# EAGLE board PCB 2.1.0 (EAGLE 6.5.0)
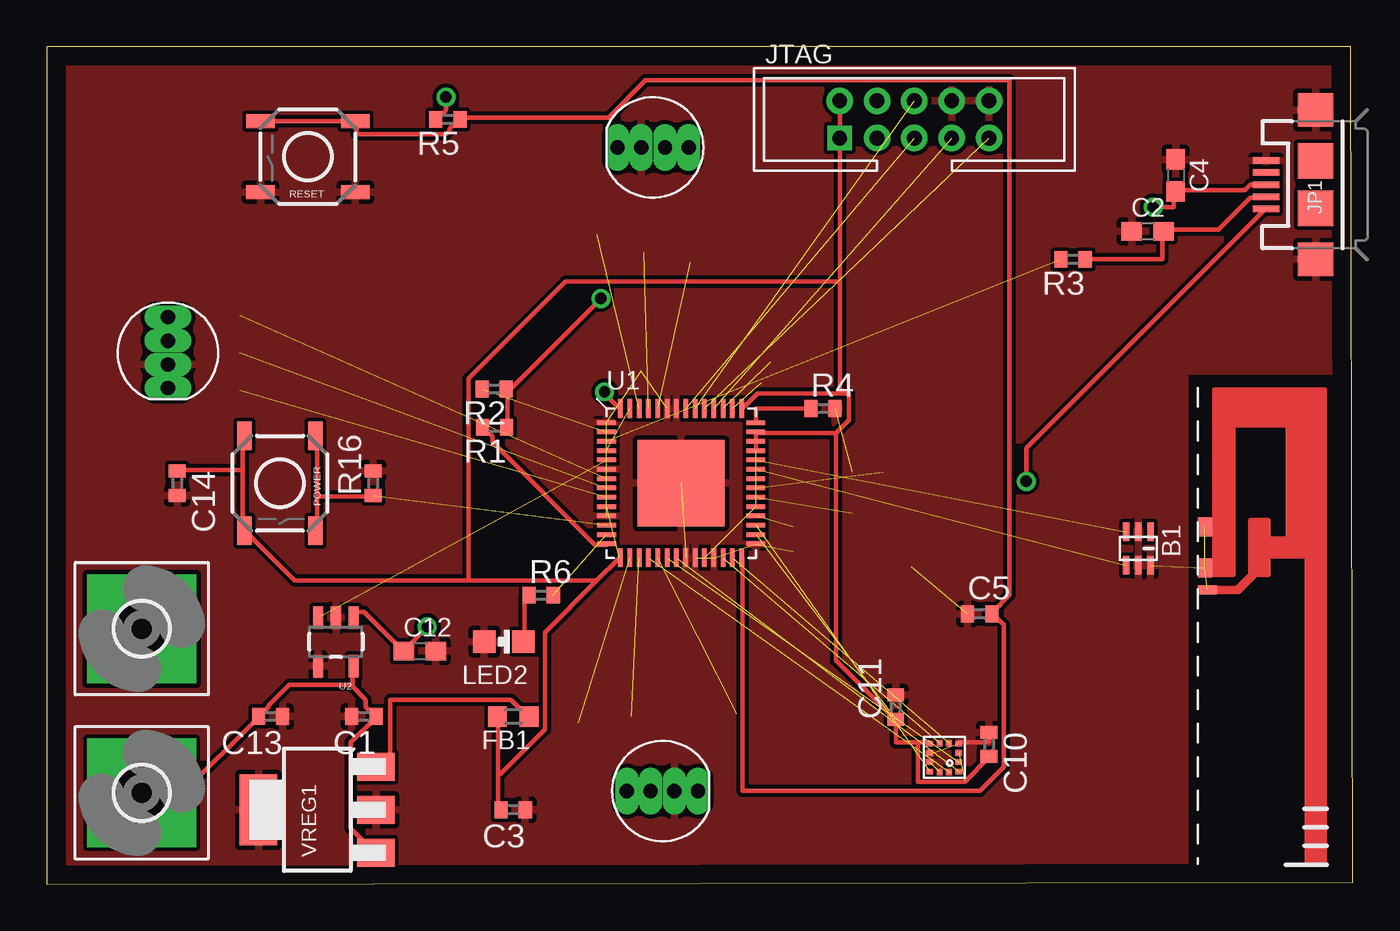
[diagram p0: board, top side]
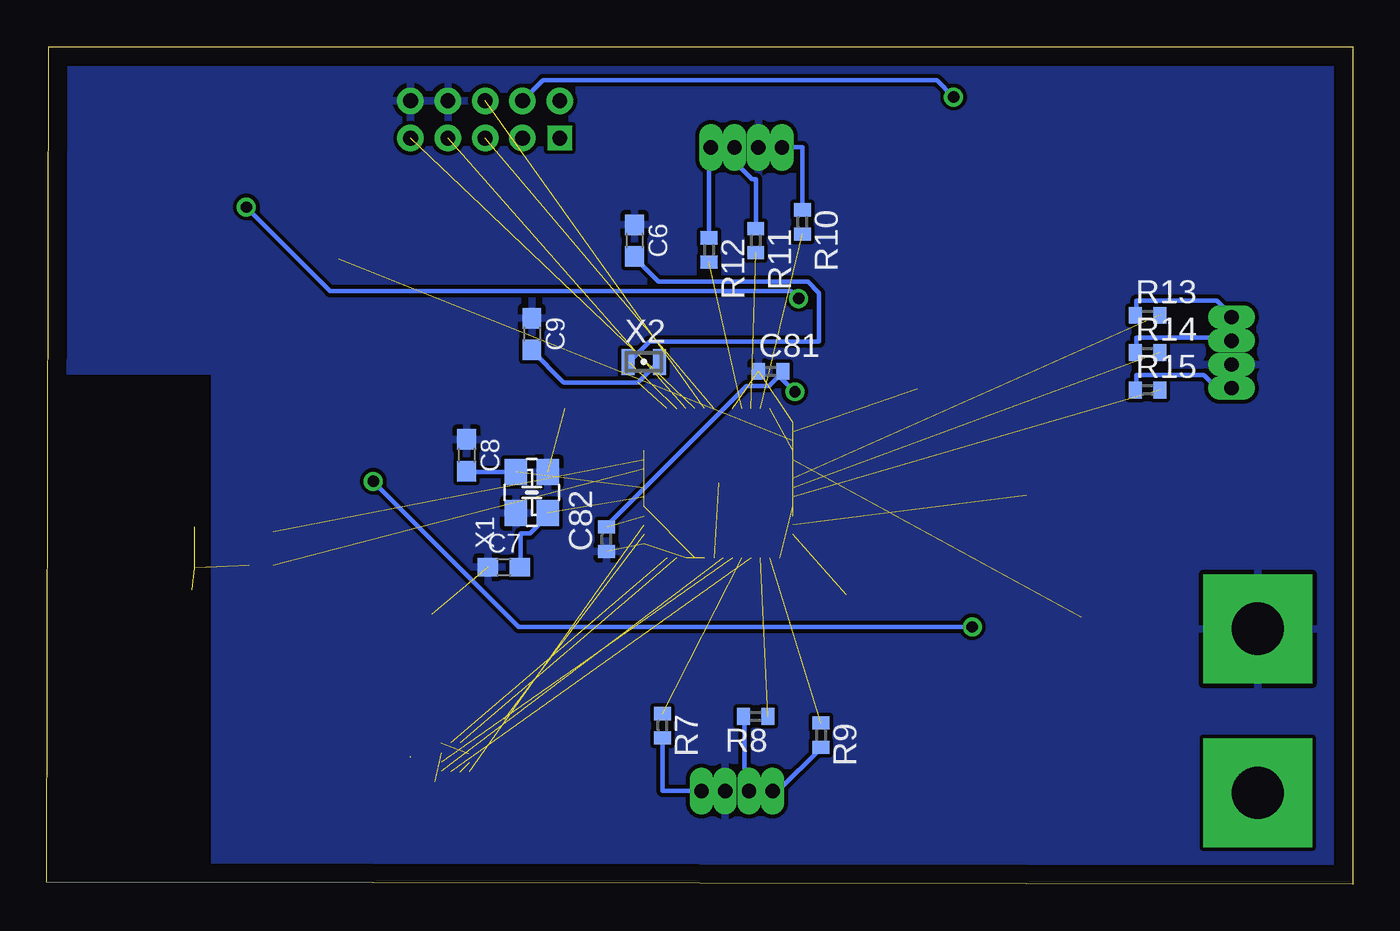
[diagram p1: board, bottom side, seen from below]

Size 70 x 44.9 mm. Coordinates in mm from the lower left corner, seen from the top.
Outline: 0,0 70,0.1 69.9,44.9 0,44.9 0,0
Copper layers (1*16): Top 0.035mm / dielectric 1.5mm / Bottom 0.035mm
Design rules "default": minimum track width 10mil, minimum drill 24mil, track to track 8mil, track to pad 8mil, pad to pad 8mil, via to via 8mil, smd to smd 8mil, copper to edge 40mil, drill to drill 8mil, minimum pad ring 10mil, minimum via ring 8mil, stop-mask expansion 4mil, vias tented up to drill 0mil, thermal gap 10mil
Net classes: 0 default: width 0.152 mm, drill 0.305 mm, clearance 0.152 mm; 1 RF: width 0.152 mm, clearance 0.152 mm

## Footprints (pad centres in the part's own frame; a part is rotated, then mirrored left to right if it is on the bottom)
BALUN-0805 = smd 1 x 0.35: 1 -0.9,0.65; 2 -0.9,0; 3 -0.9,-0.65; 4 0.9,-0.65; 5 0.9,0; 6 0.9,0.65
C0402 = smd 0.7 x 0.9: 1 -0.65,0; 2 0.65,0
C0603 = smd 1.1 x 1: 1 -0.85,0; 2 0.85,0
LED-RGB-THRU = drill 0.762 pad 0.889 long: 1 1.905,0; 2 0.635,0; 3 -0.635,0; 4 -1.905,0
R603 = smd 1 x 1.1: 1 -0.85,0; 2 0.85,0
2,8-PAD-SQUARE = drill 2.8 pad 5.842 square: B2,8 0,0
USB-MICROB = smd 0.35 x 1.4: D+ 0,2.65; D- -0.65,2.65; GND 1.3,2.65; ID 0.65,2.65; VBUS -1.3,2.65 | smd 1.8 x 1.9: MT1 -4,0; MT2 4,0 | smd 1.9 x 1.9: P$1 -1.27,0; P$2 1.27,0
HDR-2X5-2.00 = drill 0.8 square: 1 -4,-1 | drill 0.8 pad 1.422: 2 -4,1; 3 -2,-1; 4 -2,1; 5 0,-1; 6 0,1; 7 2,-1; 8 2,1; 9 4,-1; 10 4,1
LED-805 = smd 1.2 x 1.2: A 0,-1.05; C 0,1.05
TACTILE_SWITCH_SMD = smd 1.524 x 0.762: 1 -2.54,1.905; 2 2.54,1.905; 3 -2.54,-1.905; 4 2.54,-1.905
R0402 = smd 0.7 x 0.9: 1 -0.65,0; 2 0.65,0
QFN56 = smd 1 x 0.24: 1 -4,3.25; 2 -4,2.75; 3 -4,2.25; 4 -4,1.75; 5 -4,1.25; 6 -4,0.75; 7 -4,0.25; 8 -4,-0.25; 9 -4,-0.75; 10 -4,-1.25; 11 -4,-1.75; 12 -4,-2.25; 13 -4,-2.75; 14 -4,-3.25; 29 4,-3.25; 30 4,-2.75; 31 4,-2.25; 32 4,-1.75; 33 4,-1.25; 34 4,-0.75; 35 4,-0.25; 36 4,0.25; 37 4,0.75; 38 4,1.25; 39 4,1.75; 40 4,2.25; 41 4,2.75; 42 4,3.25 | smd 0.24 x 1: 15 -3.25,-4; 16 -2.75,-4; 17 -2.25,-4; 18 -1.75,-4; 19 -1.25,-4; 20 -0.75,-4; 21 -0.25,-4; 22 0.25,-4; 23 0.75,-4; 24 1.25,-4; 25 1.75,-4; 26 2.25,-4; 27 2.75,-4; 28 3.25,-4; 43 3.25,4; 44 2.75,4; 45 2.25,4; 46 1.75,4; 47 1.25,4; 48 0.75,4; 49 0.25,4; 50 -0.25,4; 51 -0.75,4; 52 -1.25,4; 53 -1.75,4; 54 -2.25,4; 55 -2.75,4; 56 -3.25,4 | smd 4.65 x 4.65: PAD 0,0
SOT23-5 = smd 0.55 x 1.2: 1 -0.95,-1.3; 2 0,-1.3; 3 0.95,-1.3; 4 0.95,1.3; 5 -0.95,1.3
12LGA_VGG3-D = smd 0.35 x 0.3: 1 -0.775,0.75; 2 -0.775,0.25; 3 -0.775,-0.25; 4 -0.775,-0.75; 7 0.775,-0.75; 8 0.775,-0.25; 9 0.775,0.25; 10 0.775,0.75 | smd 0.3 x 0.35: 5 -0.25,-0.775; 6 0.25,-0.775; 11 0.25,0.775; 12 -0.25,0.775
DN007+0 = smd 0.46 x 1: FEED 2.22,-2.8 | smd 1.01 x 0.74: GND -1.16,-2.93; GND@1 1.035,-2.93
SOT223 = smd 1.5 x 2: 1 -2.3,-3.15; 2 0,-3.15; 3 2.3,-3.15 | smd 3.8 x 2: 4 0,3.15
XTAL-4-3225 = smd 1.4 x 1.2: 1 -1.1,-0.85; 2 1.1,-0.85; 3 1.1,0.85; 4 -1.1,0.85
FC-12M = smd 0.7 x 1.4: 1 -0.85,0; 2 0.85,0

## Placement (x,y rotation side)
B1  BALUN  [BALUN-0805]  58.5,18 270 top
C1  0u1  [C0402]  17,9 180 top
C2  47p  [C0603]  59,35 0 top
C3  0u1  [C0402]  25,4 180 top
C4  47p  [C0603]  60.5,38 270 top
C5  1n  [C0402]  50,14.5 0 top
C6  47p  [C0603]  38.5,34.5 270 bottom
C7  47p  [C0603]  45.5,17 0 bottom
C8  47p  [C0603]  47.5,23 270 bottom
C9  47p  [C0603]  44,29.5 270 bottom
C10  0.1 uF  [C0402]  50.5,7.5 270 top
C11  0.1 uF  [C0402]  45.5,9.5 90 top
C12  47p  [C0603]  20,12.5 0 top
C13  0u1  [C0402]  12,9 180 top
C14  0u1  [C0402]  7,21.5 270 top
C81  1u  [C0402]  31.2,27.5 0 bottom
C82  1u  [C0402]  40,18.5 90 bottom
D1  LED-RGB-CC-THRUCLEAR  [LED-RGB-THRU]  33,5 0 top
D3  LED-RGB-CC-THRUCLEAR  [LED-RGB-THRU]  6.5,28.5 270 top
D4  LED-RGB-CC-THRUCLEAR  [LED-RGB-THRU]  32.5,39.5 180 top
FB1  [R603]  25,9 180 top
H1  MOUNT-PAD-SQUARE2.8  [2,8-PAD-SQUARE]  5.1,4.9 0 top
H2  MOUNT-PAD-SQUARE2.8  [2,8-PAD-SQUARE]  5.1,13.7 0 top
JP1  USB-MICROB  [USB-MICROB]  68,37.5 90 top
JTAG  JTAG10  [HDR-2X5-2.00]  46.5,41 0 top
LED2  [LED-805]  24.5,13 90 top
POWER  [TACTILE_SWITCH_SMD]  12.5,21.5 270 top
R1  1k5  [R0402]  24,24.5 180 top
R2  33  [R0402]  23.98,26.55 180 top
R3  33  [R0402]  55,33.5 180 top
R4  56k  [R0402]  41.6,25.5 0 top
R5  2k2  [R0402]  21.5,41 180 top
R6  470  [R0402]  26.5,15.5 0 top
R7  33  [R0402]  37,8.5 270 bottom
R8  33  [R0402]  32,9 180 bottom
R9  33  [R0402]  28.5,8 270 bottom
R10  33  [R0402]  29.5,35.5 270 bottom
R11  33  [R0402]  32,34.5 270 bottom
R12  33  [R0402]  34.5,34 270 bottom
R13  33  [R0402]  11,30.5 0 bottom
R14  33  [R0402]  11,28.5 0 bottom
R15  33  [R0402]  11,26.5 0 bottom
R16  10k  [R0402]  17.5,21.5 90 top
RESET  [TACTILE_SWITCH_SMD]  14,39 180 top
U1  CC2538  [QFN56]  34,21.5 0 top
U2  MAX1555  [SOT23-5]  15.5,13 180 top
U$1  BMA250  [12LGA_VGG3-D]  48.1,6.8 180 top
U$2  INVERTED_F_ANTENNA+0  [DN007+0]  65,18 270 top
VREG1  LM3940IMP  [SOT223]  14.5,4 90 top
X1  32MHz  [XTAL-4-3225]  44,21 90 bottom
X2  FC-12M  [FC-12M]  38,28 0 bottom

## Library data of the parts
B1 C1-C9 C12-C14 C81 C82 FB1 LED2 X1 = discrete
C10 C11 = resistor
D1 D3 D4 = SparkFun-LED; PROD_ID: DIO-08418
H1 H2 = holes
JP1 = SparkFun-Connectors; PROD_ID: CONN-09505
JTAG = jtag
POWER RESET = SparkFun-Electromechanical; PROD_ID: SWCH-08247
R1-R16 = rcl
U1 = ic
U2 = SparkFun-PowerIC
U$1 = DSSCircuits
U$2 = antenna
VREG1 = voltage-regulators
X2 = crystal

## Nets
3V3: C3.2 C14.1 FB1.2 JTAG.1 JTAG.2 POWER.3 POWER.4 U1.4 U1.10 U1.15 U1.24 U1.33 U1.36 U1.39 U1.40 U1.41 U1.43 U1.55
!RST: JTAG.4 R5.2
!RST_PIN: C5.2 R5.1 RESET.3 RESET.4 U1.28
CN1: C4.2 JP1.D+ R1.1 R2.1
DCOUPL: C81.2 C82.2 U1.32 U1.56
GND: B1.2 B1.5 B1.6 C1.2 C2.1 C3.1 C4.1 C5.1 C6.1 C7.1 C8.1 C9.1 C10.1 C11.2 C12.2 C13.1 C14.2 C81.1 C82.1 D1.2 D3.2 D4.2 H2.B2,8 JP1.GND JP1.MT1 JP1.MT2 JTAG.8 JTAG.10 LED2.C R4.2 R16.2 RESET.1 RESET.2 U1.1 U1.6 U1.11 U1.22 U1.23 U1.25 U1.29 U1.50 U1.51 U1.PAD U2.2 U2.4 U$1.4 U$1.8 U$1.9 U$1.11 U$2.FEED U$2.GND U$2.GND@1 VREG1.2 VREG1.4 X1.2 X1.4
N$1: R2.2 U1.2
N$2: R3.2 U1.3
N$3: D1.1 R7.2
N$4: R1.2 U1.14
N$5: R4.1 U1.42
N$6: JTAG.9 U1.47
N$7: JTAG.7 U1.46
N$8: U1.27 U$1.5
N$9: U1.26 U$1.6
N$10: U1.21 U$1.1
N$11: U1.18 U$1.12
N$12: C2.2 JP1.D- R3.1
N$13: U1.31 U$1.10
N$14: C1.1 C13.2 H1.B2,8 U2.5 VREG1.1
N$15: U1.20 U$1.2
N$16: D1.3 R8.2
N$17: FB1.1 VREG1.3
N$18: D1.4 R9.2
N$19: R10.2 U1.54
N$20: R11.2 U1.53
N$21: U1.5 U2.3
N$22: R12.2 U1.52
N$23: C6.2 U1.45 X2.1
N$24: D4.1 R10.1
N$25: D3.4 R13.1
N$26: D3.1 R15.1
N$27: B1.3 U1.38
N$28: B1.4 U1.37
N$29: D4.3 R11.1
N$30: C8.2 U1.35 X1.3
N$31: C7.2 U1.34 X1.1
N$32: D4.4 R12.1
N$33: R15.2 U1.9
N$34: R14.2 U1.8
N$35: D3.3 R14.1
N$36: R13.2 U1.7
N$37: R9.1 U1.16
N$38: R8.1 U1.17
N$39: R7.1 U1.19
N$40: C9.2 U1.44 X2.2
N$41: POWER.1 POWER.2 R16.1 U1.12
N$42: LED2.A R6.1
N$43: R6.2 U1.13
N$45: C10.2 C11.1 U1.30 U$1.3 U$1.7
PB6: JTAG.5 U1.49
PB7: JTAG.6 U1.48
VBUS: C12.1 JP1.VBUS U2.1

## Tracks (layer width: path | path; a pad name or v marks a point on that pad's centre or on a via)
3V3  (6 unrouted)
  Top 0.254: 10.5,22.2 7,22.2 C14.1 | 10.5,22.2 10.5,24 POWER.3 | 10.5,22.2 10.5,19 POWER.4 10.7,18.9 13.3,16.3 22.6,16.3 | 24.2,5.9 24.2,9 FB1.2 | 24.2,5.9 24.2,4.1 24.3,4 C3.2 | 29.45,16.25 26.7,13.5 26.7,8.3 24.3,5.9 24.2,5.9 | 29.45,16.25 30.7,17.5 U1.15 | 22.6,16.3 29.4,16.3 29.45,16.25 | JTAG.2 JTAG.1 42.5,32.3 | U1.39 U1.40 U1.41 38.1,24.2 42.3,24.2 | 42.5,26.3 43,26.3 43,24.9 42.3,24.2 | 42.5,26.3 38.1,26.3 37.3,25.5 U1.43 | 42.5,26.3 42.5,32.3 | 45.4,8.9 42.3,12 42.3,24.2 | 22.6,16.3 22.6,27.1 27.8,32.3 42.5,32.3
!RST  (via drill 0.61)
  Top 0.254: v21.4,42.2 21.4,41.5 20.9,41 R5.2
  Bottom 0.254: v21.4,42.2 22.3,43.1 43.4,43.1 JTAG.4
!RST_PIN
  Top 0.254: RESET.4 11.5,40.9 16.5,40.9 RESET.3 16.6,40.9 16.6,40.2 21.4,40.2 21.6,40.4 21.6,40.5 22.1,41 R5.1 22.2,41.1 30.1,41.1 32.1,43.1 51.6,43.1 51.6,15.5 50.7,14.6 C5.2 50.7,14.5 51.3,13.9 51.3,6.3 50,5 37.3,5 37.3,17.5 U1.28
CN1  (via drill 0.61)
  Top 0.254: R1.1 24.7,24.5 24.7,26.5 R2.1 24.8,26.5 v29.7,31.4 | JP1.D+ 64.5,37.5 64.2,37.2 60.5,37.2 C4.2 60.4,37.1 60.4,36.3 v59.3,36.3
  Bottom 0.254: v29.7,31.4 30.1,31.8 54.8,31.8 v59.3,36.3
DCOUPL  (via drill 0.61)  (1 unrouted)
  Top 0.254: v29.9,26.4 29.9,26.3 30.7,25.5 U1.56
  Bottom 0.254: C82.2 40,19.2 32.5,26.7 31.3,26.7 30.5,27.5 C81.2 30.7,27.2 v29.9,26.4
GND  (15 unrouted)
  Top 0.254: C10.1 50.5,7.6 48.9,7.6 U$1.4 | U$1.9 47.3,6.6 47.33,6.61 | U$1.8 47.4,7 47.33,6.99
  pour Top: -0.5,45.5 70.5,45.5 70.5,27.5 61,27.5 61,-1 -0.5,-1
  pour Bottom: -0.5,45 70,45 70,27.5 61,27.5 61,-0.5 -0.5,-0.5
N$1  (1 unrouted)
N$2  (1 unrouted)
N$3
  Bottom 0.254: R7.2 37,5 D1.1
N$4
  Top 0.254: R1.2 23.4,24.5 23.9,24 23.9,23.7 29.4,18.2 30,18.2 U1.14
N$5
  Top 0.254: R4.1 38,25.5 U1.42
N$6  (1 unrouted)
N$7  (1 unrouted)
N$8  (1 unrouted)
N$9  (1 unrouted)
N$10  (1 unrouted)
N$11  (1 unrouted)
N$12
  Top 0.254: R3.1 59.8,33.5 59.8,35 C2.2 59.9,35.1 62.8,35.1 64.5,36.8 65.3,36.8 JP1.D-
N$13  (1 unrouted)
N$14
  Top 0.254: 16.4,10.7 13,10.7 11.9,9.6 11.9,9.5 11.4,9 C13.2 11.3,8.9 7.3,4.9 H1.B2,8 | 16.4,10.7 16.4,11.6 U2.5 | 16.4,10.7 16.4,10.6 17.1,9.9 17.1,9.5 17.6,9 C1.1 17.6,8.9 16.3,7.6 16.3,3 17.6,1.7 VREG1.1
N$15  (1 unrouted)
N$16
  Bottom 0.254: D1.3 32.6,5 32.6,9 R8.2
N$17
  Top 0.254: FB1.1 25.8,9 24.9,9.9 18.4,9.9 18.4,7 17.7,6.3 VREG1.3
N$18
  Bottom 0.254: D1.4 30.8,5 28.5,7.3 R9.2
N$19  (1 unrouted)
N$20  (1 unrouted)
N$21  (1 unrouted)
N$22  (1 unrouted)
N$23  (1 unrouted)
  Bottom 0.254: C6.2 38.5,33.6 37.2,32.3 29.2,32.3 28.6,31.7 28.6,29.1 37.7,29.1 38.8,28 X2.1
N$24
  Bottom 0.254: R10.1 29.5,39.5 D4.1
N$25
  Bottom 0.254: R13.1 11.6,30.5 11.6,31.3 7.3,31.3 6.5,30.5 D3.4
N$26
  Bottom 0.254: R15.1 11.6,26.5 11.6,27.3 8,27.3 7.3,26.6 D3.1
N$27  (1 unrouted)
N$28  (1 unrouted)
N$29
  Bottom 0.254: R11.1 32,37.8 32.2,37.8 33.1,38.7 33.1,39.5 D4.3
N$30  (1 unrouted)
  Bottom 0.254: X1.3 47.5,22.1 C8.2
N$31  (1 unrouted)
  Bottom 0.254: C7.2 44.6,17 44.6,18.8 44.1,18.8 43.2,19.7 43.2,19.9 X1.1
N$32
  Bottom 0.254: R12.1 34.5,39.5 D4.4
N$33  (1 unrouted)
N$34  (1 unrouted)
N$35
  Bottom 0.254: R14.1 11.6,28.5 11.6,29.3 6.6,29.3 6.5,29.2 D3.3
N$36  (1 unrouted)
N$37  (1 unrouted)
N$38  (1 unrouted)
N$39  (1 unrouted)
N$40  (1 unrouted)
  Bottom 0.254: C9.2 44,28.6 42.3,26.9 38.3,26.9 37.2,28 X2.2
N$41  (1 unrouted)
  Top 0.254: 14.5,20.8 17.5,20.8 R16.1 | 14.5,20.8 14.5,19 POWER.2 | 14.5,20.8 14.5,24 POWER.1
N$42
  Top 0.254: R6.1 25.8,15.5 25.6,15.3 25.6,13 LED2.A
N$43  (1 unrouted)
N$45  (3 unrouted)
  Top 0.254: 46.7,7.6 45.5,7.6 C11.1 | 46.7,7.6 47.3,7.6 U$1.7 | 50.5,6.8 49.2,5.5 46.7,5.5 46.7,7.6
PB6  (1 unrouted)
PB7  (1 unrouted)
VBUS  (via drill 0.61)
  Top 0.254: U2.1 16.5,14.4 16.5,14.6 17,14.6 19.1,12.5 C12.1 19.2,12.6 v20.4,13.8 | v52.5,21.6 52.5,23.4 65.3,36.2 JP1.VBUS
  Bottom 0.254: v52.5,21.6 44.7,13.8 v20.4,13.8